# Altium PCB Copy of MASTER.PcbDoc
Units mm, origin at the board's own origin, x right, y up, seen from the top; angles counter-clockwise.
Board outline 65.41 x 68.71 mm, 2 copper layers (Top Layer, Bottom Layer); 58 components, 43 nets, 233 pads, 38 vias.
Unrouted connection lines stored in the file: 18.
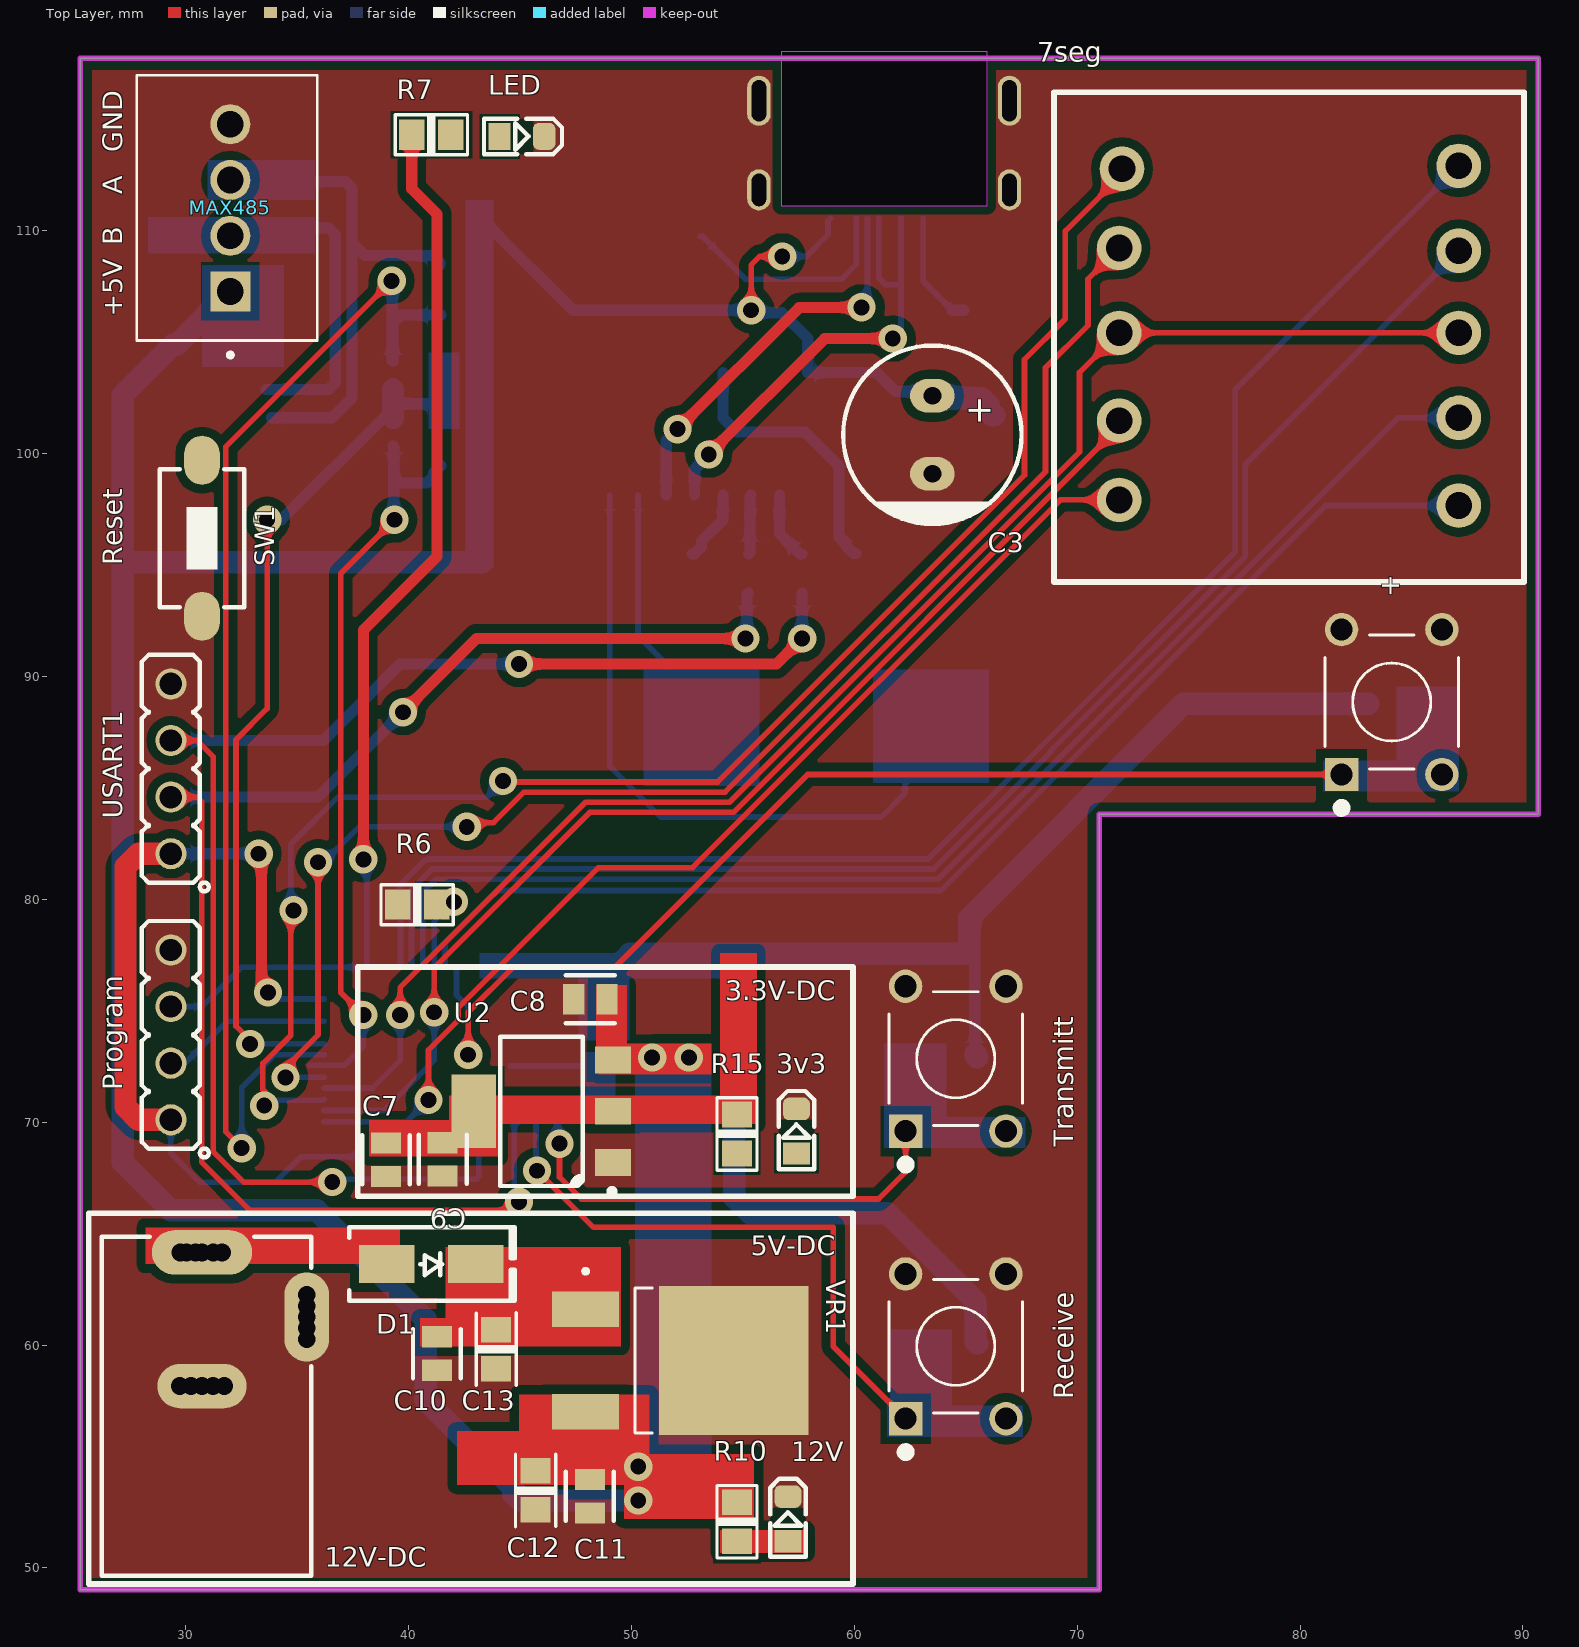
[diagram p0: Top Layer view]
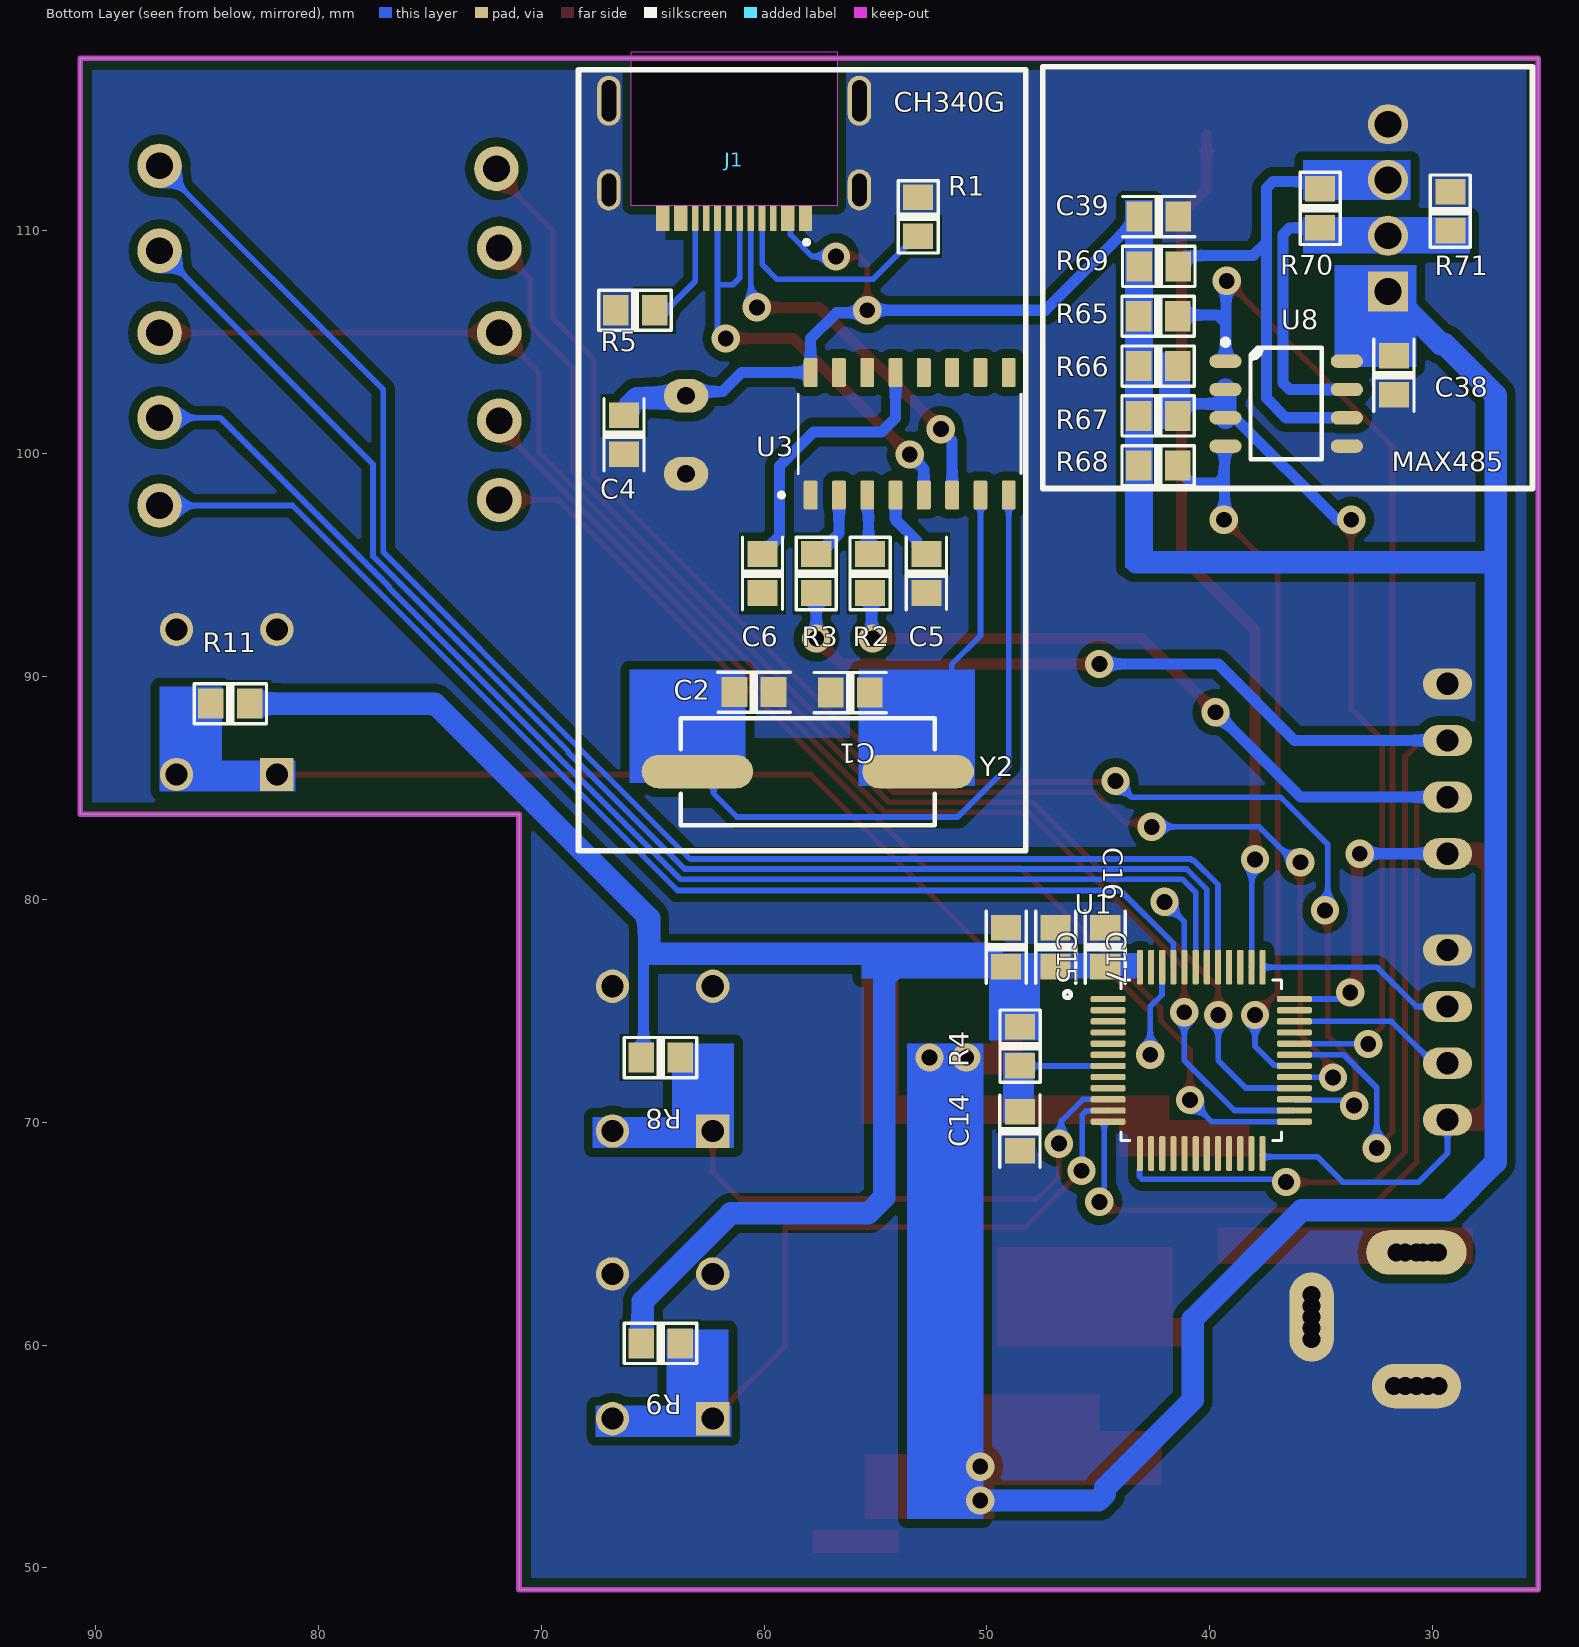
[diagram p1: Bottom Layer view, seen from below]

## Layer stack, top to bottom
Top Solder: solder mask 0.0102, Solder Resist, Dk 3.5
Top Layer: signal copper 0.0356
Dielectric 1: dielectric 0.32, FR-4, Dk 4.8
Bottom Layer: signal copper 0.0356
Bottom Solder: solder mask 0.0102, Solder Resist, Dk 3.5

## Board outline
25.273,49.022 25.273,117.729 90.678,117.729 90.678,83.82 70.993,83.82 70.993,49.022

## Design rules (kind name [scope] priority, off if disabled: settings)
Clearance [All] p1: gap=0.4 ignorepadtopadclearanceinfootprint=TRUE except(0: Arc-Hole Track-Hole SMDPad-Hole THPad-Hole Via-Hole Fill-Hole Poly-Hole Region-Hole Text-Hole; 0.1: Arc-SMDPad Arc-THPad Track-SMDPad Track-THPad SMDPad-SMDPad; 0.2: Arc-Arc Arc-Track Track-Track; 0.254: Arc-Via Arc-Text Track-Via Track-Text SMDPad-THPad SMDPad-Via SMDPad-Text THPad-THPad THPad-Via THPad-Text Via-Via Via-Text Fill-Text Poly-Text Region-Text Text-Text)
PolygonConnect [All] p1: connectstyle=Direct reliefconductorwidth=0.254 reliefentries=4 polygonreliefangle="90 Angle" airgapwidth=0.254
RoomDefinition CH340G [InComponentClass('CH340G')] p1: confinementstyle=ConfineIn formatcopy=TRUE lockcomponents=FALSE outline 47.752,117.745 47.752,82.169 68.316,82.169 68.316,117.745
RoomDefinition MAX485 [InComponentClass('MAX485')] p2: confinementstyle=ConfineIn formatcopy=TRUE lockcomponents=FALSE outline 46.228,117.753 25.668,117.753 25.668,98.35 46.228,98.35
RoomDefinition "Supply 12V to 5V-7805 smd" [InComponentClass('Supply 12V to 5V-7805 smd')] p3: confinementstyle=ConfineIn formatcopy=TRUE lockcomponents=FALSE outline 59.944,65.786 25.273,65.786 25.273,49.022 59.944,49.022
RoomDefinition "Supply 5V to 3V3- Ams1117" [InComponentClass('Supply 5V to 3V3- Ams1117')] p4: confinementstyle=ConfineIn formatcopy=TRUE lockcomponents=FALSE outline 60.071,76.92 37.592,76.92 37.592,66.506 60.071,66.506
RoutingVias [All] p1: holewidth=0.711 width=1.27 viastyle="Through Hole" minholewidth=0.711 minwidth=1.27 maxholewidth=0.711 maxwidth=1.27
SolderMaskExpansion [All] p1: expansion=0.102 istentingtop=FALSE
Width [All] p1: maxlimit=1 minlimit=0.254 preferedwidth=0.5 minimp=50.000000 maximp=50.000000 favimp=50.000000
30 further rules are at their usual default settings.

## Classes and differential pairs
component class "Supply 12V to 5V-7805 smd": 12V 12V-DC C10 C11 C12 C13 D1 R10 VR1
component class "Supply 5V to 3V3- Ams1117": 3v3 C7 C8 C9 R15 U2
component class Micro: 7seg + C14 C15 C16 C17 LED Program R4 R6 R7 R8 R9 R11 Receive SW1 Transmitt U1 USART1
component class MAX485: C38 C39 MAX485 R65 R66 R67 R68 R69 R70 R71 U8
component class CH340G: C1 C2 C3 C4 C5 C6 J1 R1 R2 R3 R5 U3 Y2

## Components (designator, comment, footprint, x,y, rotation, side; value= is the part's Value field where it differs from the comment)
3v3 "LED SMD 0805 GREEN" LED_0805_GREEN 57.404,69.596 r90 top
7seg "7seg" PCBComponent_1 69.596,94.742 r0 top
12V "LED SMD 0805 GREEN" LED_0805_GREEN 57.023,52.197 r90 top
12V-DC "Power Jack" DC005 30.734,49.657 r90 top
+ "FSM8JH" SW_FSM8JH 84.11,88.848 r90 top
C1 "22pF" "CAP 0805_2012" 56.134,89.281 r0 bottom value=100nF
C2 "22pF" "CAP 0805_2012" 60.452,89.281 r180 bottom value=100nF
C3 "10uF 6.3V" "CAP ALTH D8 L3.5 H12.5" 63.5,100.838 r270 top
C4 "100nF" "CAP 0805_2012" 66.294,100.838 r270 bottom
C5 "100nF" "CAP 0805_2012" 52.705,94.615 r90 bottom
C6 "100nF" "CAP 0805_2012" 60.061,94.615 r90 bottom
C7 "10uF" FP-C0805C-DN-MFG 38.989,68.314 r90 top value="0.22 μF"
C8 "10uF" FP-C0805C-DN-MFG 48.161,75.511 r0 top value="0.22 μF"
C9 "100nF" FP-C0805C-DN-MFG 41.529,68.326 r90 top value="0.22 μF"
C10 "10uF" FP-C0805C-DN-MFG 41.275,59.618 r90 top value="0.22 μF"
C11 "10uF" FP-C0805C-DN-MFG 48.133,53.213 r90 top value="0.22 μF"
C12 "100nF" "CAP 0805_2012" 45.708,53.477 r90 top
C13 "100nF" "CAP 0805_2012" 43.942,59.817 r90 top
C14 "100nF" "CAP 0805_2012" 48.514,69.596 r90 bottom
C15 "100nF" "CAP 0805_2012" 49.149,77.851 r270 bottom
C16 "100nF" "CAP 0805_2012" 44.704,77.851 r270 bottom
C17 "100nF" "CAP 0805_2012" 46.926,77.851 r270 bottom
C38 "10uF" "CAP 0805_2012" 31.75,103.505 r270 bottom value=100nF
C39 "100nF" "CAP 0805_2012" 42.291,110.617 r180 bottom
D1 "SS14" "DO-214AC SMA" 41.021,63.627 r0 top
J1 "2340901-1" TE_2340901-1 61.341,115.824 r0 bottom
LED "LED SMD 0805 GREEN" LED_0805_GREEN 45.085,114.225 r0 top
MAX485 "1881574" PHOENIX_1881574 35.904,105.068 r90 top
Program "HDR1X4" HDR_1X4 29.337,73.914 r90 top value=HDRM4
R1 "5.1K" "RES 0805_2012" 53.086,110.617 r270 bottom value=1K
R2 "1K" "RES 0805_2012" 55.245,94.615 r90 bottom
R3 "1K" "RES 0805_2012" 57.658,94.615 r90 bottom
R4 "10K" "RES 0805_2012" 48.514,73.406 r90 bottom value=1K
R5 "5.1K" "RES 0805_2012" 65.786,106.426 r180 bottom value=1K
R6 "10K" "RES 0805_2012" 40.386,79.756 r0 top value=1K
R7 "330" "RES 0805_2012" 41.021,114.3 r0 top value=1K
R8 "10K" "RES 0805_2012" 64.641,72.898 r0 bottom value=1K
R9 "10K" "RES 0805_2012" 64.641,60.071 r0 bottom value=1K
R10 "1K" "RES 0805_2012" 54.737,52.07 r270 top
R11 "10K" "RES 0805_2012" 83.947,88.773 r180 bottom value=1K
R15 "330" "RES 0805_2012" 54.737,69.469 r270 top value=1K
R65 "10k" "RES 0805_2012" 42.319,106.157 r0 bottom value=1K
R66 "10k" "RES 0805_2012" 42.319,103.921 r0 bottom value=1K
R67 "10k" "RES 0805_2012" 42.319,101.686 r0 bottom value=1K
R68 "10k" "RES 0805_2012" 42.319,99.451 r0 bottom value=1K
R69 "20k" "RES 0805_2012" 42.291,108.392 r0 bottom value=1K
R70 "120" "RES 0805_2012" 35.052,110.998 r90 bottom value=1K
R71 "20k" "RES 0805_2012" 29.21,110.871 r270 bottom value=1K
Receive "FSM8JH" SW_FSM8JH 64.552,59.944 r90 top
SW1 "Tactile 2PIN 6X3.5mm H4.57mm (SMD)" SWPBS_SPST_6X3X5 30.734,96.195 r90 top
Transmitt "FSM8JH" SW_FSM8JH 64.552,72.846 r90 top
U1 "STM32F103C8T6" QFP50P900X900X160-48N 40.386,72.771 r180 bottom
U2 "LD1117-3.3V" "SOT-223-4 6.5X7MM P2.3MM" 45.974,70.485 r180 top
U3 "CH340G" SOIC127P600X180-16N 53.467,100.882 r90 bottom
U8 "ADM485" "SOIC-8 4.9X3.9MM P1.27MM" 36.576,102.235 r180 bottom
USART1 "HDR1X4" HDR_1X4 29.337,85.852 r90 top value=HDRM4
VR1 "L78M12ABDT" VREG_L78M12ABDT 52.197,59.309 r0 top
Y2 "12MHz" "HC-49S SMD" 58.039,85.725 r180 bottom

## Footprints (in the part's own frame and the unit in brackets; to place one, negate y for a bottom-side part, rotate by r counter-clockwise, add the part's x,y. Pads: shape width x height; smd on the part's side, far side on the other; paste and mask are expansions set on the pad)
"CAP 0805_2012" [mm] "Chip Capacitor, 2-Leads, Body 2.00x1.20mm, IPC Medium Density"
  rect 1.15x1.35 smd: 1(-0.875,0.01) 2(0.875,0.01)
  silkscreen extent -1.62,-0.89 1.63,0.91, body extent -0.99,-0.65 1.01,0.62, height 1.26
"CAP ALTH D8 L3.5 H12.5" [mm] "8MM Diameter, 3.5MM Lead Spacing Aluminium Capacitor"
  oval 1.5x2 hole 0.8: 1(-1.75,0) 2(1.75,0)
  silkscreen extent -4,-4 4,4, body extent -4,-4 4,4, height 11.5
DC005 [mm] "Power Adaptor Jack"
  round 1.5 hole 0.8: 1(14.5,-0.902) 1(14.5,-0.502) 1(14.5,0.298) 1(14.5,0.698) 1(14.5,0.978) 2(8.5,-1) 2(8.5,1) 2(8.5,-0.5) 2(8.5,0.5) 3(10.6,-4.7) 3(11.1,-4.7) 3(12.1,-4.7) 3(12.6,-4.7)
  oval 2x4.5 hole 0.8: 1(14.5,0)
  oval 2x4 hole 0.8: 2(8.5,0)
  oval 4x2 hole 0.8: 3(11.6,-4.7)
  silkscreen extent 0,-4.9 15.2,4.5, body extent -0.11,-4.7 15.09,4.7, height 11.1
"DO-214AC SMA" [mm] "Molded Diode, 2-Leads, Body 4.30x2.60mm, IPC Medium Density"
  rect 2.5x1.7 smd: 1(-2,0) 2(2,0)
  Top Layer pour cut-out: -1.905,1.397 2.159,1.397 2.159,-1.524 -1.905,-1.524
  silkscreen extent -3.68,-1.65 3.75,1.65, body extent -2.6,-1.37 2.6,1.37, height 2.4
FP-C0805C-DN-MFG [mm]
  rect 0.95x1.35 smd paste+0 mask+0: 1(-0.75,0) 2(0.75,0)
  silkscreen extent -1.1,-1.07 1.1,1.07, body extent -1,-0.62 1,0.63, height 0.88
"HC-49S SMD" [mm] "SMD crystal resonator, ABL, ABLS, HC-49, HC49 11X4.5MM"
  oval 5x1.5 smd: 1(-4.953,0) 2(4.953,0)
  Top Layer pour cut-out: -5.715,1.524 5.715,1.524 5.715,-1.778 5.588,-1.651 -5.715,-1.651
  silkscreen extent -5.7,-2.4 5.7,2.4, body extent -6.4,-2.41 6.4,2.41, height 4.3
HDR_1X4 [mm] "Connector; Header; 4 Position"
  round 1.4 / inner round 1.4 / far side oval 1.4x2.2 hole 1 mask+0.1: 1(-3.81,0) 2(-1.27,0) 3(1.27,0) 4(3.81,0)
  silkscreen extent -5.5,-1.7 5.11,1.3
LED_0805_GREEN [mm] "LED SMD 0805, GREEN"
  rect 1x1.2 smd mask+0.075: 1(-1,0)
  rrect50% 1x1.2 smd mask+0.075: 2(1,0)
  Top Layer pour cut-out: -0.5,0.8 0.5,0.8 0.5,-0.8 -0.5,-0.8
  silkscreen extent -1.7,-0.8 1.8,0.8, body extent -1,-0.63 1,0.63, height 0.7
PCBComponent_1 [mm]
  round 2 hole 1.2: 1(2.413,18.034) 2(2.286,14.478) 3(2.286,10.668) 4(2.286,6.731) 5(2.286,3.175) 6(17.526,2.921) 7(17.526,6.858) 8(17.526,10.668) 9(17.526,14.351) 10(17.526,18.161)
  silkscreen extent -0.64,-0.51 20.45,21.46, body extent -0.7,-0.41 20.52,21.59, height 16.61
PHOENIX_1881574 [mm]
  rect 1.8x1.8 / inner round 1.8 / far side rect 1.8x1.8 hole 1.2: 01(2.2,3.9)
  round 1.8 hole 1.2: 02(4.7,3.9) 03(7.2,3.9) 04(9.7,3.9)
  silkscreen extent -0.75,0 11.9,8.1
QFP50P900X900X160-48N [mm]
  rrect50% 1.56x0.28 smd: 1(-4.18,2.75) 2(-4.18,2.25) 3(-4.18,1.75) 4(-4.18,1.25) 5(-4.18,0.75) 6(-4.18,0.25) 7(-4.18,-0.25) 8(-4.18,-0.75) 9(-4.18,-1.25) 10(-4.18,-1.75) 11(-4.18,-2.25) 12(-4.18,-2.75) 25(4.18,-2.75) 26(4.18,-2.25) 27(4.18,-1.75) 28(4.18,-1.25) 29(4.18,-0.75) 30(4.18,-0.25) 31(4.18,0.25) 32(4.18,0.75) 33(4.18,1.25) 34(4.18,1.75) 35(4.18,2.25) 36(4.18,2.75)
  rrect50% 0.28x1.56 smd: 13(-2.75,-4.18) 14(-2.25,-4.18) 15(-1.75,-4.18) 16(-1.25,-4.18) 17(-0.75,-4.18) 18(-0.25,-4.18) 19(0.25,-4.18) 20(0.75,-4.18) 21(1.25,-4.18) 22(1.75,-4.18) 23(2.25,-4.18) 24(2.75,-4.18) 37(2.75,4.18) 38(2.25,4.18) 39(1.75,4.18) 40(1.25,4.18) 41(0.75,4.18) 42(0.25,4.18) 43(-0.25,4.18) 44(-0.75,4.18) 45(-1.25,4.18) 46(-1.75,4.18) 47(-2.25,4.18) 48(-2.75,4.18)
  silkscreen extent -6.15,-3.6 3.6,3.6, body extent -4.5,-4.5 4.5,4.5, height 1.6
"RES 0805_2012" [mm] "Chip Resistor, 2-Leads, Body 2.00x1.25mm, IPC Medium Density"
  rect 1.15x1.35 smd: 1(-0.875,0) 2(0.875,0)
  silkscreen extent -1.62,-0.9 1.63,0.9, body extent -0.95,-0.62 1.05,0.63, height 0.6
SOIC127P600X180-16N [mm]
  rrect25% 1.31x0.62 smd: 1(-2.75,4.445) 2(-2.75,3.175) 3(-2.75,1.905) 4(-2.75,0.635) 5(-2.75,-0.635) 6(-2.75,-1.905) 7(-2.75,-3.175) 8(-2.75,-4.445) 9(2.75,-4.445) 10(2.75,-3.175) 11(2.75,-1.905) 12(2.75,-0.635) 13(2.75,0.635) 14(2.75,1.905) 15(2.75,3.175) 16(2.75,4.445)
  silkscreen extent -2.85,-5 1.78,5.85, body extent -3,-5 3,5, height 1.8
"SOIC-8 4.9X3.9MM P1.27MM" [mm] "SOIC, 8-Leads, Body 4.90x3.90mm, Pitch 1.27mm, IPC Medium Density"
  oval 1.45x0.6 smd: 1(-2.725,1.905) 2(-2.725,0.635) 3(-2.725,-0.635) 4(-2.725,-1.905) 5(2.725,-1.905) 6(2.725,-0.635) 7(2.725,0.635) 8(2.725,1.905)
  silkscreen extent -2.85,-2.5 1.6,2.88, body extent -3.01,-2.45 3.01,2.45, height 1.5
"SOT-223-4 6.5X7MM P2.3MM" [mm] "SOT223, 4-Leads, Body 6.50x7.00mm (avg), Pitch 2.30mm, IPC Medium Density"
  rect 1.6x1.2 smd: 1(-3.2,2.3) 2(-3.2,0) 3(-3.2,-2.3)
  rect 2x3.3 smd: 4(3.048,0)
  silkscreen extent -3.27,-3.35 1.85,3.72, body extent -3.52,-3.25 3.5,3.25, height 1.8
SW_FSM8JH [mm]
  rect 1.498x1.498 / inner round 1.498 / far side rect 1.498x1.498 hole 0.99: 1(-3.25,2.25)
  round 1.498 hole 0.99: 2(-3.25,-2.25) 3(3.25,2.25) 4(3.25,-2.25)
  silkscreen extent -4.95,-3 3,3, body extent -3,-3.95 3,3.95, height 9.5
SWPBS_SPST_6X3X5 [mm] "SWITCH, PUSHBUTTON, SMD, SPST, 6X3.5mm, SKQMBBE010, 50000 Cycles, 1.57N Force"
  oval 2.2x1.6 smd mask+0.1: 1(-3.5,0) 2(3.5,0)
  silkscreen extent -3.1,-1.9 3.1,1.9, body extent -3.65,-1.75 3.65,1.75, height 5
TE_2340901-1 [mm]
  rect 0.6x1.15 smd: A1/B12(-3.2,5.275) A4/B9(-2.4,5.275) B1/A12(3.2,5.275) B4/AP(2.4,5.275)
  rect 0.3x1.15 smd: A5(-1.25,5.275) A6(-0.25,5.275) A7(0.25,5.275) A8(1.25,5.275) B5(1.75,5.275) B6(0.75,5.275) B7(-0.75,5.275) B8(-1.75,5.275)
  oval 1.05x1.85 hole 0.65 slot 1.45 at 90 deg: SH1(-5.62,4) SH2(5.62,4)
  oval 1.05x2.25 hole 0.65 slot 1.85 at 90 deg: SH3(-5.62,0) SH4(5.62,0)
  Keep-Out Layer board cut-out: -4.62,-2.2 -4.62,4.7 4.62,4.7 4.62,-2.2
  silkscreen extent -3.35,6.25 -3.15,6.45, body extent -5.77,0 5.77,7.55, height 1.58
VREG_L78M12ABDT [mm]
  rect 3x1.6 smd: 1(-4.25,2.3) 3(-4.25,-2.3)
  rect 6.7x6.7 smd paste-2.645: 2(2.4,0)
  silkscreen extent -4.35,-3.25 -1.26,4.1, body extent -4.86,-3.25 4.86,3.25, height 2.4

## Part data
7seg: "file:///C:/Users/Tamana/Downloads/7SEG-12-19mm-GREEN-ANOD.pdf"
12V-DC: PartNumber=DC005-5.5MM
+ Receive Transmitt: "Tactile Switch SPST-NO Top Actuated Through Hole", Package=None, Availability="In Stock", Check_prices=https://www.snapeda.com/parts/FSM8JH/TE+Connectivity+ALCOSWITCH+Switches/view-part/?ref=eda, MF="TE Connectivity", MP=FSM8JH, Price=None, SnapEDA_Link=https://www.snapeda.com/parts/FSM8JH/TE+Connectivity+ALCOSWITCH+Switches/view-part/?ref=snap
C1 C2 C4 C5 C6 C14 C15 C16 C17 C38 C39: library part "Cap 0805", "SMT Capacitor"
C3: library part "Cap Alu TH D8mm L3.5mm H12.5mm", "TH Aluminum Polymer Capacitor"
C7 C8 C9 C10 C11: library part CMP-1036-04552-2, "CAP CER 0.22UF 50V X7R 0805", Capacitance="0.22 μF", Manufacturer=KEMET, Manufacturer Part Number=C0805C224K5RACTU, Package=C0805C-DN, Temperature="-55°C to +125°C", Temperature Characteristic=X7R, Temperature Coefficient=30ppm/°C, Temperature Range High=+125°C, Temperature Range Low=-55°C, Tolerance=0.1, Voltage Rating="50 V", Automotive=No, Category=Cap, ComponentLink2Description=Datasheet, ComponentLink2URL=https://content.kemet.com/datasheets/KEM_C1003_C0G_SMD.pdf, Device Class L1="Passive Components", Device Class L2=Capacitors, Device Class L3="Ceramic Capacitors", Digikey Description="CAP CER 0.22UF 50V X7R 0805", Height=0.88mm, Ipc Land Pattern Name=CAPC200125X78, Lead Free=Yes, Material=Ceramic, Mouser Description="CAP CER 0.22UF 50V X7R 0805", Octopart=https://octopart.com/c0805c224k5ractu-kemet-144670, RoHS=TRUE
C12 C13: library part LD051C182KAB2A, "COMMERCIAL CHIP STD JAPAN BULK - FN TAPE/REEL, 7 INCH PAPER TAPE", Package=None, Availability=Unavailable, MP=LD051C182KAB2A, Price=None
D1: library part "SS14 (SMD SMA)", "Diode Schottky 40V 1A Surface Mount SMA (DO-214AC)", PartNumber=SS14
J1: "USB Type C 2.0 Conn Rec Mid-Mount One Ro", Package=None, Check_prices=https://www.snapeda.com/parts/2340901-1/TE+Connectivity/view-part/?ref=eda, MF="TE Connectivity", MP=2340901-1, SnapEDA_Link=https://www.snapeda.com/parts/2340901-1/TE+Connectivity/view-part/?ref=snap
MAX485: Package=None, Availability=Unavailable, MF="{'manufacturer': u'Phoenix Contact'}", MP=1881574, Price=None
Program USART1: library part HDR_1X4, "CONN, HEADER, Male, pitch: 2.54mm, 4POS"
R1 R2 R3 R4 R5 R6 R7 R8 R9 R10 R11 R15 R65 R66 R67 R68 R69 R70 R71: library part "Res 0805", "SMT Resistor"
SW1: "Tactile Switch SPST-NO Top Actuated Surface Mount", PartNumber=FSMSMTR-ND
U1: "ARM® Cortex®-M3 STM32F1 Microcontroller IC 32-Bit 72MHz 64KB (64K x 8) FLASH 48-LQFP (7x7)", Package="LQFP-48 STMicroelectronics", Check_prices=https://www.snapeda.com/parts/STM32F103C8T6/STMicroelectronics/view-part/?ref=eda, MF=STMicroelectronics, MP=STM32F103C8T6, SnapEDA_Link=https://www.snapeda.com/parts/STM32F103C8T6/STMicroelectronics/view-part/?ref=snap
U2: library part "LD1117-3.3V (SMD SOT-223)", "Linear Voltage Regulator IC  1 Output  800mA SOT-223", PartNumber=LD1117S33CTR
U3: "USB Interface Integrated Circuit", Package=None, Availability="Not in stock", Check_prices=https://www.snapeda.com/parts/Ch340G/WCH/view-part/?ref=eda, MF=WCH, MP=Ch340G, Price=None, SnapEDA_Link=https://www.snapeda.com/parts/Ch340G/WCH/view-part/?ref=snap
U8: library part "ADM485 (SMD)", "RS485 Interface", PartNumber=ADM4853ARZ-REEL7
VR1: "Linear Voltage Regulator IC Positive Fixed 1 Output 500mA DPAK", Package="TO-252 STMicroelectronics", Availability="Not in stock", Check_prices=https://www.snapeda.com/parts/L78M12ABDT/STMicroelectronics/view-part/?ref=eda, MF=STMicroelectronics, MP=L78M12ABDT, Price=None, SnapEDA_Link=https://www.snapeda.com/parts/L78M12ABDT/STMicroelectronics/view-part/?ref=snap
Y2: library part "Crystal HC-49S SMD 8MHz", "SMT Crystal", PartNumber=ABLS-8.000MHZ-K4T

## Via types
v1: diameter 1.27, hole 0.711, Top Layer to Bottom Layer, 38 vias

## Nets (pads, with @x,y where several pads share a name; then routed paths per layer and width w, separated by ;. In a path a pad name is that pad's centre, name@x,y a point inside that pad or via, vN(x,y) a via of type N, cw(c..) or ccw(c..) an arc to the next point about the centre after c; other vN are vias at no path point)
3v3: C7.2 C9.2 C15.2 C16.2 C17.2 Program.1 R4.2 R8.2 R9.2 R11.2 R15.1 U1.9 U1.24 U1.36 U1.48 U2.2 U2.4 USART1.1 | length 112.7
  Top Layer w0.5: v1(33.274,82.042) 33.401,81.915 33.401,76.325 33.699,76.027 v1(33.699,75.819)
  Top Layer w1: Program.1 27.891,70.104 27.305,70.69 27.305,81.456 27.891,82.042 USART1.1
  Bottom Layer w0.254: Program.1 29.337,68.602 30.629,67.31 34.036,67.31 35.171,68.445 37.623,68.445 37.636,68.458 U1.24 ; v1(33.699,75.819) 33.974,75.819 34.272,75.521 U1.36
  Bottom Layer w0.5: USART1.1 v1(33.274,82.042) ; 65.405,79.402 65.405,73.109 R8.2@65.441,73.073
  Bottom Layer w1: 50.414,77.025 49.314,77.025 49.314,77.051 C15.2@49.428,77.051 ; 50.414,77.445 49.9,77.445 49.506,77.051 C15.2@49.428,77.051 ; 54.029,77.025 54.615,76.44 54.615,66.621 55.323,65.913 61.491,65.913 65.441,61.963 65.441,60.146 R9.2 ; 64.917,77.551 49.928,77.551 C15.2@49.428,77.051 ; 65.152,77.551 65.152,79.148 74.776,88.773 R11.2 ; R8.2@65.441,73.073 65.441,72.973 R8.2
+5: J1.B4/AP
+12: C10.2 C13.2 D1.2 VR1.1
a: 7seg.7 U1.43 | length 58.7
  Bottom Layer w0.254: U1.43 40.636,80.3 41.235,80.899 63.747,80.899 76.815,93.967 76.815,94.019 84.396,101.6 7seg.7
b: 7seg.6 U1.45 | length 54.7
  Bottom Layer w0.254: U1.45 41.636,78.01 44.017,80.391 63.881,80.391 81.153,97.663 7seg.6
c: 7seg.4 U1.26 | length 51.1
  Top Layer w0.254: v1(41.148,74.93) 41.148,76.915 48.13,83.897 54.581,83.897 71.882,101.198 7seg.4
  Bottom Layer w0.254: U1.26 38.898,70.521 41.148,72.771 v1(41.148,74.93)
com: 7seg.3 7seg.8 U1.28 | length 69
  Top Layer w0.254: v1(39.624,74.803) 39.624,76.033 47.942,84.351 54.393,84.351 70.104,100.062 70.104,103.632 7seg.3 7seg.8
  Bottom Layer w0.254: U1.28 36.219,71.534 38.387,71.534 39.624,72.771 v1(39.624,74.803)
d: 7seg.2 U1.29 | length 63.3
  Top Layer w0.254: v1(34.479,72.005) 34.479,72.452 35.941,73.914 v1(35.941,81.661) ; v1(42.608,83.248) 42.799,83.439 43.808,83.439 45.174,84.805 54.205,84.805 68.58,99.18 68.58,103.843 70.485,105.748 70.485,107.823 7seg.2
  Bottom Layer w0.254: v1(34.479,72.005) 34.487,72.013 36.198,72.013 U1.29 ; v1(35.941,81.661) 36.195,81.661 37.782,83.248 v1(42.608,83.248)
D+: J1.A6 J1.B6 U3.5 | length 21.8
  Top Layer w0.5: v1(53.467,99.949) 58.674,105.156 v1(61.722,105.156)
  Bottom Layer w0.254: J1.A6 61.091,107.883 61.405,107.569 62.091,107.569 ; v1(61.722,105.156) 62.091,105.525 62.091,107.569 ; J1.B6 62.091,107.569
  Bottom Layer w0.5: U3.5 52.832,99.3 53.467,99.935 v1(53.467,99.949)
D-: J1.A7 J1.B7 U3.6 | length 17.8
  Top Layer w0.5: v1(52.07,101.092) 57.531,106.553 v1(60.325,106.553)
  Bottom Layer w0.254: v1(60.325,106.553) 60.325,106.828 60.591,107.094 J1.B7
  Bottom Layer w0.5: U3.6 51.562,100.584 v1(52.07,101.092)
DP: 7seg.5 U1.25 | length 48.9
  Top Layer w0.254: v1(40.894,70.993) 40.894,73.239 42.218,74.563 42.218,75.118 48.518,81.419 52.745,81.419 69.243,97.917 7seg.5
  Bottom Layer w0.254: U1.25 39.922,70.021 v1(40.894,70.993)
e: 7seg.1 U1.27 | length 70.9
  Top Layer w0.254: v1(33.528,70.739) 33.64,70.739 33.909,71.008 33.463,71.454 33.463,72.638 34.715,73.89 34.715,79.379 v1(34.838,79.502) ; v1(44.236,85.304) 44.281,85.259 53.868,85.259 67.637,99.027 67.637,104.213 69.469,106.045 69.469,109.982 72.009,112.522 7seg.1
  Bottom Layer w0.254: v1(33.528,70.739) 33.659,70.739 33.909,70.989 36.174,70.989 U1.27 ; v1(34.838,79.502) 34.715,79.625 34.715,82.467 36.83,84.582 43.514,84.582 v1(44.236,85.304)
f: 7seg.9 U1.42 | length 64.8
  Bottom Layer w0.254: U1.42 40.136,80.442 41.047,81.353 63.559,81.353 68.78,86.574 68.78,86.626 77.543,95.389 77.543,99.514 7seg.9
g: 7seg.10 U1.41 | length 68.8
  Bottom Layer w0.254: U1.41 39.636,80.657 40.73,81.751 40.804,81.751 40.859,81.807 63.319,81.807 68.326,86.814 77.089,95.577 77.089,102.87 7seg.10
GND: 3v3.2 12V-DC.2 12V-DC.3 12V.2 +.3 +.4 C1.2 C2.2 C3.2 C4.2 C5.1 C7.1 C8.1 C9.1 C10.1 C11.1 C12.1 C13.1 C14.1 C15.1 C16.1 C17.1 C38.2 C39.2 J1.A1/B12 J1.B1/A12 J1.SH1 J1.SH2 J1.SH3 J1.SH4 LED.2 MAX485.04 Program.4 R1.1 R5.1 R6.1 R71.1 Receive.3 Receive.4 SW1.1 Transmitt.3 Transmitt.4 U1.23 U1.35 U1.47 U2.1 U3.1 U8.5 USART1.4 VR1.2
INC: +.1 +.2 R11.1 U1.46 | length 49.7
  Top Layer w0.254: v1(42.672,73.025) 42.672,74.93 44.704,76.962 49.276,76.962 57.912,85.598 +.1
  Bottom Layer w0.254: U1.46 42.149,76.938 42.149,75.707 42.672,75.184 v1(42.672,73.025)
LED: R7.1 U1.38 | length 39.3
  Top Layer w0.5: v1(37.973,81.788) 37.973,92.075 41.275,95.377 41.275,110.744 40.146,111.873 R7.1
  Bottom Layer w0.254: v1(37.973,81.788) 38.123,81.638 38.123,76.964 U1.38
Net3v3_1: 3v3.1 R15.2
Net12V-DC_1: 12V-DC.1 D1.1
Net12V_1: 12V.1 R10.2
NetC3_1: C3.1 C4.1 C8.2 C11.2 C12.2 C38.1 C39.1 J1.A4/B9 MAX485.01 R10.1 R65.2 R66.2 R67.2 R68.2 R69.2 U2.3 U3.16 U8.8 VR1.3 | length 123.8
  Top Layer w0.254: v1(55.372,106.426) 55.372,108.458 55.753,108.839 v1(56.769,108.839)
  Bottom Layer w0.254: v1(56.769,108.839) 57.845,108.839 58.822,109.816 58.822,110.43 J1.A4/B9
  Bottom Layer w0.5: C39.1 43.166,110.527 43.491,110.202 43.591,110.202 47.367,106.426 v1(55.372,106.426) 55.487,106.311 56.757,106.311 57.912,105.156 U3.16 61.004,103.632 61.856,102.779 63.309,102.779 C3.1
  Bottom Layer w1: MAX485.01 29.638,104.902 29.464,104.902 27.178,102.616 27.178,95.123 ; 43.307,95.123 27.178,95.123 ; v1(50.304,53.021) 44.997,53.021 44.704,53.314 44.704,53.594 40.767,57.531 40.767,61.155 35.882,66.04 29.337,66.04 27.178,68.199 27.178,95.123 ; C3.1 63.596,102.492 65.705,102.492 66.04,102.157 66.04,101.957 66.109,101.888 66.109,101.788 66.184,101.713 C4.1
  other v1: 50.304,54.545 50.927,72.898 52.578,72.898
NetC5_2: C5.2 U3.4 | length 3.3
  Bottom Layer w0.5: C5.2 52.815,95.49 53.14,95.815 53.14,96.064 54.102,97.026 U3.4
NetC6_2: C6.2 U3.13 | length 12.4
  Bottom Layer w0.5: U3.13 54.102,101.6 54.737,100.965 57.785,100.965 59.309,99.441 59.309,96.266 59.646,95.929 59.646,95.829 59.971,95.504 C6.2@60.071,95.504
NetJ1_A5: J1.A5 R1.2 | length 10.1
  Bottom Layer w0.254: R1.2 53.186,109.742 55.105,107.823 59.436,107.823 60.083,108.47 J1.A5@60.083,110.549
NetJ1_B5: J1.B5 R5.2 | length 5.2
  Bottom Layer w0.254: J1.B5 63.091,107.724 R5.2@64.389,106.426
  Bottom Layer w0.5: R5.2@64.389,106.426 R5.2
NetLED_1: LED.1 R7.2
NetMAX485_02: MAX485.02 R70.1 R71.2 U8.7 | length 11.7
  Bottom Layer w0.5: U8.7@33.597,102.87 36.418,102.87 36.711,103.163 36.711,109.83 36.418,110.123 R70.1
NetMAX485_03: MAX485.03 R69.1 R70.2 U8.6 | length 20.5
  Bottom Layer w0.5: U8.6 36.576,101.6 37.465,102.489 37.465,109.474 ; R70.2 35.377,112.198 37.172,112.198 37.465,111.905 37.465,109.474 ; R69.1@41.416,108.458 41.416,108.558 41.091,108.883 38.056,108.883 37.465,109.474
NetR2_2: R2.2 U3.3 | length 2.7
  Bottom Layer w0.5: R2.2 55.312,95.557 55.312,98.072 U3.3
NetR3_2: R3.2 U3.2 | length 3.1
  Bottom Layer w0.5: U3.2 56.642,96.406 57.558,95.49 R3.2
NetR6_2: R6.2 U1.44 | length 3.3
  Bottom Layer w0.254: U1.44 41.149,76.964 41.149,78.995 v1(42.037,79.883)
NetR66_1: R66.1 R67.1 U1.32 U8.2 U8.3 | length 38.8
  Top Layer w0.254: v1(32.893,73.505) 32.893,73.672 32.258,74.307 32.258,87.155 33.655,88.552 v1(33.655,97.028)
  Bottom Layer w0.254: v1(32.893,73.505) 32.901,73.513 36.198,73.513 U1.32
  Bottom Layer w0.5: v1(33.655,97.028) 34.304,97.028 38.876,101.6 U8.3 ; 39.301,102.235 41.402,102.235 41.529,102.362
  Bottom Layer w1: U8.3 39.301,102.235 U8.2
NRST: C6.1 C14.2 R4.1 SW1.2 U1.7 | length 4
  Bottom Layer w0.254: U1.7 48.504,72.521 R4.1
Receiver: R9.1 Receive.1 Receive.2 U1.11 | length 28
  Top Layer w0.254: v1(45.759,67.818) 48.299,65.278 59.055,65.278 59.055,59.941 Receive.1
  Bottom Layer w0.254: U1.11 44.579,70.508 45.548,70.508 45.72,70.336 45.72,67.857 v1(45.759,67.818)
RX: R65.1 U1.31 U8.1 | length 56.9
  Top Layer w0.254: v1(32.512,68.834) 32.512,68.855 31.804,69.563 31.804,100.305 v1(39.243,107.744)
  Bottom Layer w0.254: v1(32.512,68.834) 32.512,71.541 33.992,73.021 U1.31
  Bottom Layer w0.5: v1(39.243,107.744) 39.272,107.715 39.272,104.169 U8.1 39.301,105.849 39.658,106.206 R65.1@41.444,106.206
RXD: R3.1 U1.13 USART1.3 | length 66
  Top Layer w0.254: USART1.3 30.507,87.122 31.242,86.387 31.242,68.667 32.599,67.31 v1(36.576,67.31)
  Top Layer w0.5: v1(44.958,90.551) 56.515,90.551 v1(57.658,91.694)
  Bottom Layer w0.254: v1@36.576,67.437 43.041,67.437 43.157,67.553 43.157,67.871 43.149,67.879 U1.13@43.149,68.57 ; v1@36.449,67.31 v1(36.576,67.31) v1@36.449,67.31
  Bottom Layer w0.5: USART1.3 36.195,87.122 39.624,90.551 v1(44.958,90.551) ; v1(57.658,91.694) R3.1
SWCLK: Program.3 U1.37 | length 9
  Bottom Layer w0.254: Program.3 30.734,75.184 32.501,76.951 U1.37
SWDIO: Program.2 U1.34 | length 7.6
  Bottom Layer w0.254: Program.2 29.972,72.644 31.849,74.521 U1.34
Transmitt: R8.1 Transmitt.1 Transmitt.2 U1.10 | length 23.3
  Top Layer w0.254: v1(46.775,69.034) 46.775,67.532 47.759,66.548 61.087,66.548 62.302,67.763 Transmitt.1
  Bottom Layer w0.254: U1.10 45.692,71.021 46.663,70.05 46.663,69.146 v1(46.775,69.034)
TX: R68.1 U1.30 U8.4 | length 33.8
  Top Layer w0.254: v1(37.973,74.803) 36.957,75.819 36.957,94.615 v1(39.37,97.028)
  Bottom Layer w0.254: U1.30@35.568,72.554 37.121,72.554 37.973,73.406 v1(37.973,74.803)
  Bottom Layer w0.5: U8.4 39.336,100.295 39.336,98.937 ; v1(39.37,97.028) 39.336,97.062 39.336,98.937 ; R68.1 41.119,99.126 41.119,98.972 40.826,98.679 39.594,98.679 39.336,98.937
TXD: R2.1 U1.12 USART1.2 | length 67.6
  Top Layer w0.254: USART1.2 30.507,84.582 30.715,84.374 30.715,68.218 32.893,66.04 44.577,66.04 v1(44.958,66.421)
  Top Layer w0.5: v1(39.751,88.392) 43.053,91.694 v1(55.118,91.694)
  Bottom Layer w0.254: U1.12@44.938,70.008 44.743,70.008 44.743,66.911 44.958,66.696 v1(44.958,66.421)
  Bottom Layer w0.5: USART1.2 35.941,84.582 v1(39.751,88.392) ; v1(55.118,91.694) 55.181,91.757 55.181,93.677 R2.1
XI: C1.1 U3.7 Y2.2 | length 15.9
  Bottom Layer w0.254: U3.7 50.292,91.821 51.584,90.529 51.584,90.17 53.499,88.255 53.594,88.255 ; 51.572,88.255 53.594,88.255 ; 53.594,87.503 53.594,88.255 ; 55.386,88.255 53.594,88.255
XO: C2.1 U3.8 Y2.1 | length 33.9
  Bottom Layer w0.254: U3.8 49.022,85.979 51.308,83.693 61.214,83.693 62.264,84.743 62.264,85.149 62.839,85.725 Y2.1 ; Y2.1@61.454,85.366 61.454,86.36 61.454,87.376 ; Y2.1@61.581,86.36 61.581,87.376 61.581,89.291 61.581,90.053
pads on no net: J1.A8 J1.B8 U1.1 U1.2 U1.3 U1.4 U1.5 U1.6 U1.8 U1.14 U1.15 U1.16 U1.17 U1.18 U1.19 U1.20 U1.21 U1.22 U1.33 U1.39 U1.40 U3.9 U3.10 U3.11 U3.12 U3.14 U3.15

## Polygon pours and split planes (outlines as drawn)
GND on Top Layer "GND_L01_P001" (solid, remove dead copper, pour order 1): 25.273,49.022 25.273,117.729 90.678,117.729 90.678,83.82 70.993,83.82 70.993,49.022
GND on Bottom Layer "GND_L02_P002" (solid, remove dead copper, pour order 2): 25.273,49.022 25.273,117.729 90.678,117.729 90.678,83.82 70.993,83.82 70.993,49.022

## Keep-outs
Keep-Out Layer:
  the board outline again, w0.254

## Other copper
Top Layer:
  rectangle net 3v3: 53.975,69.923 55.626,77.597
  rectangle net NetC3_1: 42.164,53.721 46.101,56.134
  rectangle net NetC3_1: 49.657,52.197 55.499,55.118
  rectangle net Net12V_1: 53.975,50.673 57.823,51.697
  rectangle net +12: 40.513,59.944 44.704,61.214
  rectangle net +12: 41.656,59.944 49.53,64.389
  rectangle net NetC3_1: 44.958,53.721 50.8,57.785
  rectangle net NetC3_1: 48.514,72.136 53.594,73.533
  region net NetC3_1: 49.812,76.146 48.415,76.146 48.415,72.209 49.812,72.209
  region net 3v3: 44.069,70.104 38.227,70.104 38.227,68.453 44.069,68.453
  region net 3v3: 55.626,71.193 41.811,71.193 41.811,69.923 55.626,69.923
  rectangle net Net12V-DC_1: 28.194,63.627 39.624,65.278
Bottom Layer:
  rectangle net INC: 84.328,84.836 87.122,89.535
  rectangle net INC: 81.026,84.836 87.122,86.233
  rectangle net Receiver: 61.468,55.88 67.564,57.277
  rectangle net Transmitt: 61.595,68.834 67.691,70.231
  rectangle net Receiver: 61.595,56.007 64.389,60.706
  rectangle net Transmitt: 61.341,68.834 64.135,73.533
  rectangle net NetC3_1: 50.165,52.197 53.594,73.533
  rectangle net 3v3: 47.625,73.66 49.911,77.597
  rectangle net 3v3: 43.18,76.454 55.626,77.597
  rectangle net NRST: 47.879,69.977 49.276,73.152
  rectangle net NetR66_1: 40.894,101.092 42.291,104.521
  rectangle net XI: 50.546,85.09 55.753,90.297
  rectangle net XO: 60.833,85.217 66.04,90.297
  rectangle net NetC3_1: 42.545,94.869 43.815,111.379
  rectangle net NetMAX485_02: 28.321,108.966 35.814,110.617
  rectangle net NetMAX485_03: 30.988,111.379 35.814,113.157
  rectangle net NetC3_1: 30.734,103.886 34.417,108.458

## Silkscreen, mask and mechanical layers (free items; w line width, h text height)
Top Overlay:
  lines w0.254: 25.654,49.276 59.944,49.276 59.944,65.913 25.654,65.913 25.654,49.276 ; 37.719,66.675 59.944,66.675 59.944,76.962 37.719,76.962 37.719,66.675
  text "GND" at 27.447,113.503 h1.52 r90
  text "A" at 27.447,111.633 h1.52 r90
  text "B" at 27.447,109.332 h1.52 r90
  text "+5V" at 27.447,106.126 h1.52 r90
  text "Reset" at 27.447,94.977 h1.52 r90
  text "3.3V-DC" at 54.217,75.169 h1.52
  text "5V-DC" at 55.364,63.739 h1.52
Bottom Overlay:
  lines w0.254: 25.527,98.425 47.498,98.425 47.498,117.348 25.527,117.348 25.527,98.425 ; 48.26,82.169 48.26,117.221 68.326,117.221 68.326,82.169 48.26,82.169
  text "CH340G" at 54.185,115.047 h1.52
  text "MAX485" at 31.829,98.918 h1.52

## Text inside footprints (layer, text, board x,y; h text height)
C3: Top Overlay "+" at 64.75,102.588 h2 r270
J1: Mechanical 13 "PCB EDGE" at 68.834,117.602 h1.02 r180